# Altium PCB load-cell.PcbDoc
Units mm, origin at the board's own origin, x right, y up, seen from the top; angles counter-clockwise.
Board outline 30 x 35 mm, 2 copper layers (Top Layer, Bottom Layer), stack 0.451 mm thick; 33 components, 26 nets, 115 pads, 59 vias.
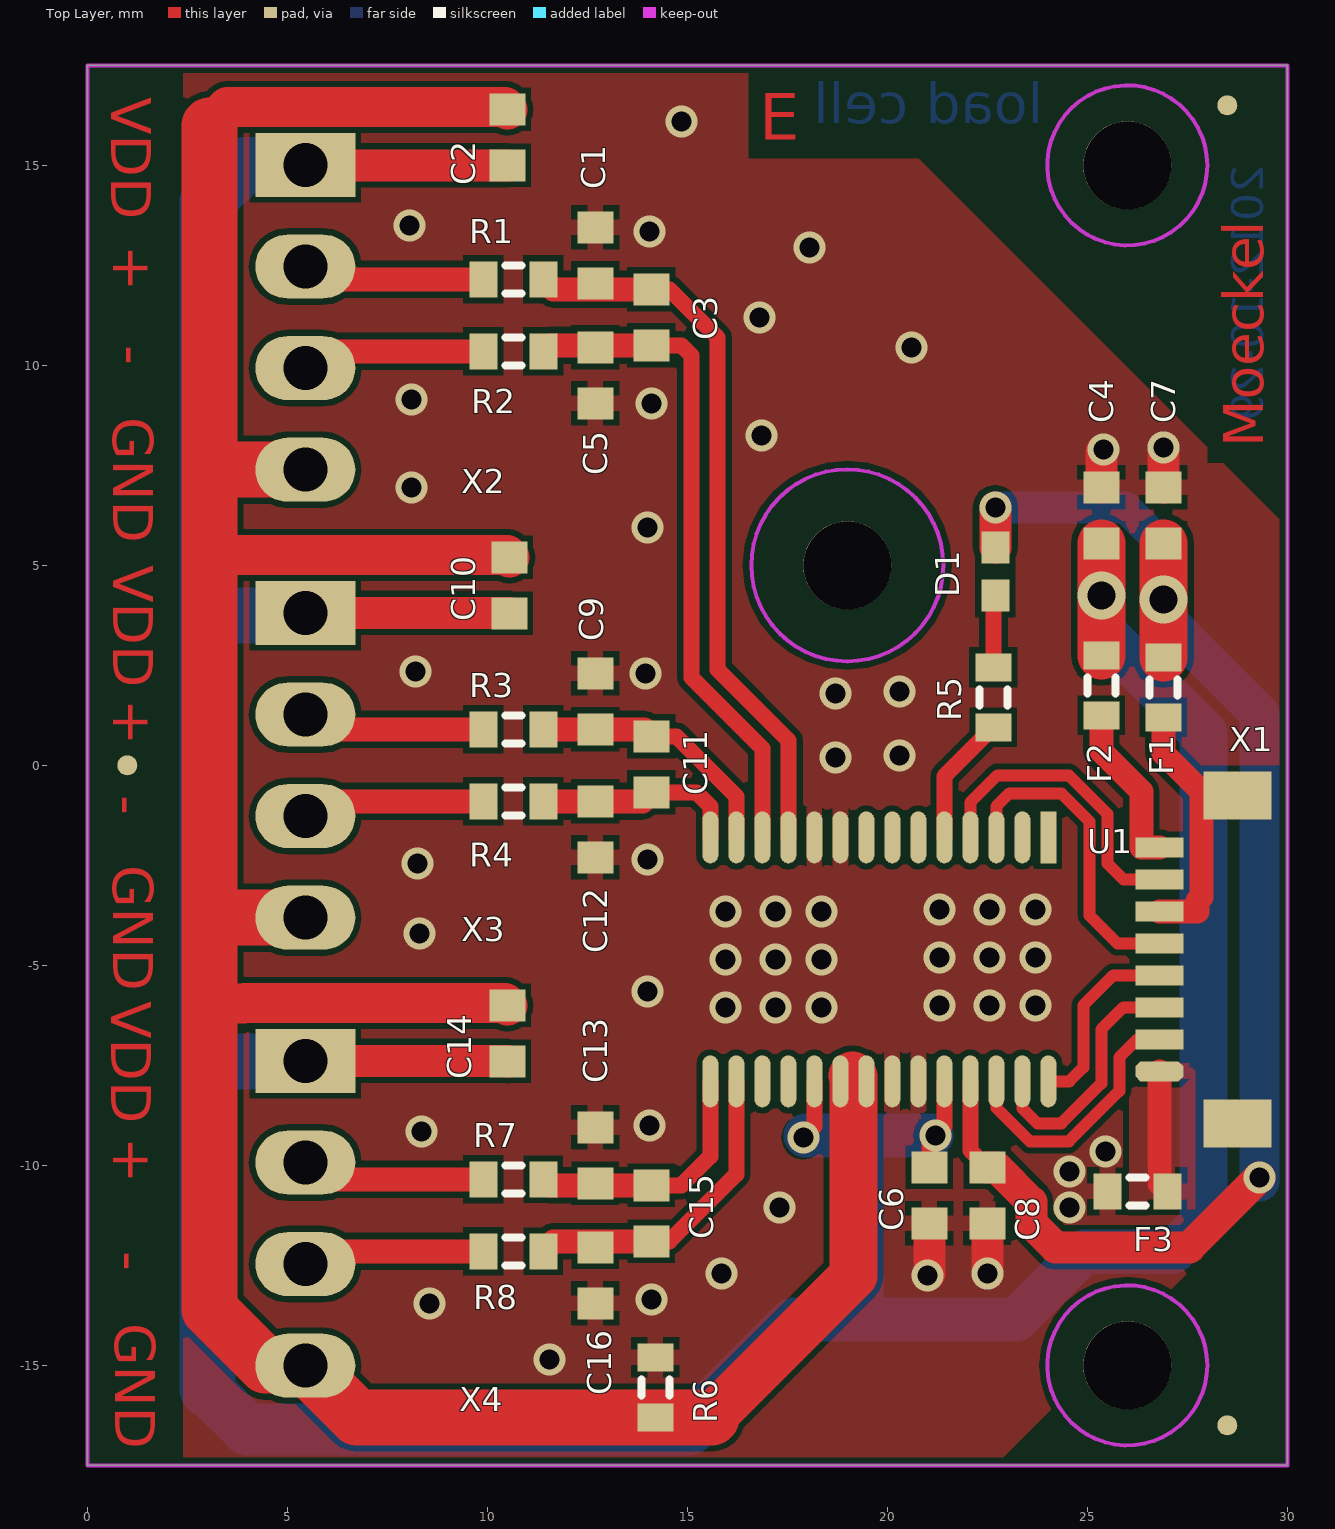
[diagram p0: Top Layer view]
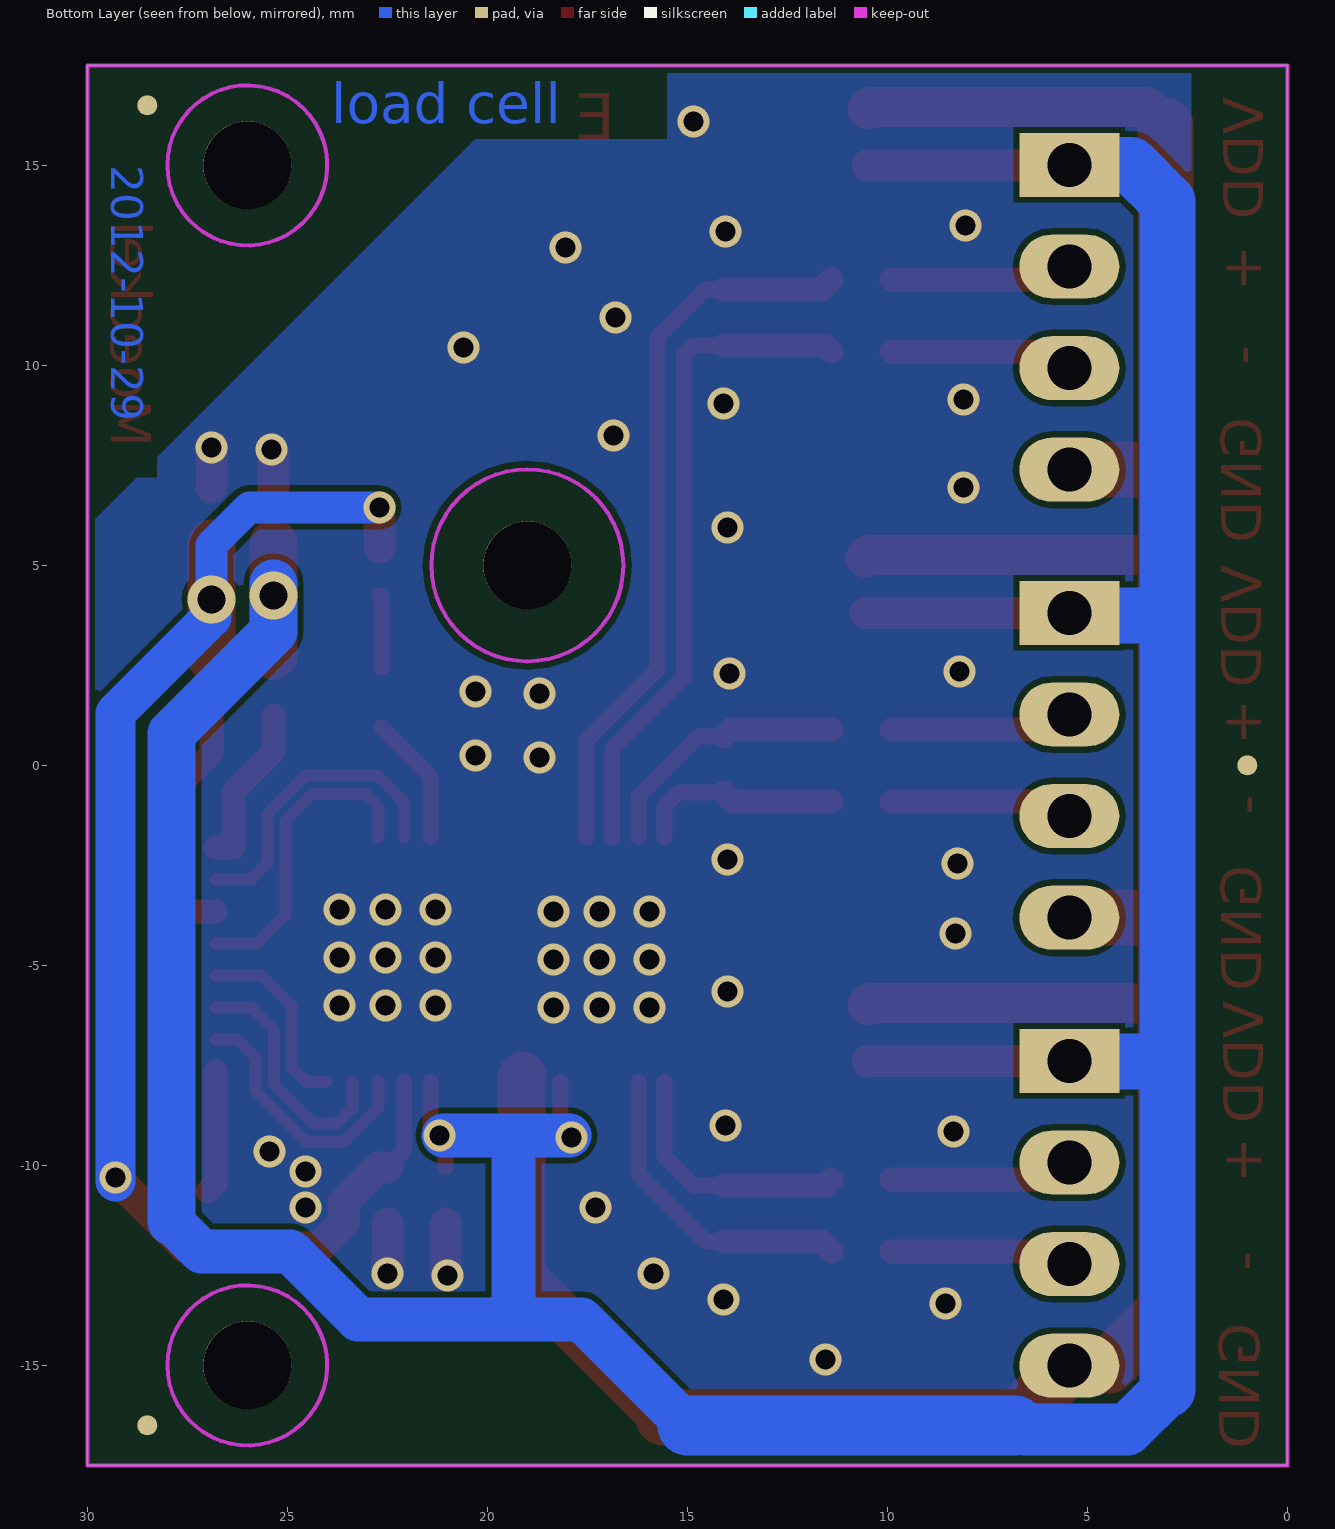
[diagram p1: Bottom Layer view, seen from below]

## Layer stack, top to bottom
Top Solder: solder mask 0.0102, Solder Resist, Dk 3.5
Top Layer: signal copper 0.0356
Dielectric1: prepreg 0.38, FR-4, Dk 4.8
Bottom Layer: signal copper 0.0356
Bottom Solder: solder mask 0.0102, Solder Resist, Dk 3.5

## Board outline
0,-17.5 30,-17.5 30,17.5 0,17.5

## Design rules (kind name [scope] priority, off if disabled: settings)
Clearance [All] p1: gap=0.15
FabricationTestPointUsage TestPointUsage [All] p1: valid=0 allowmultiple=FALSE
FabricationTestpoint Testpoint [All] p1: side=3 testpointundercomponent=TRUE minsize=1.016 maxsize=2.54 preferedsize=1.524 minholesize=0 maxholesize=1.016 preferedholesize=0.813 testpointgrid=0.025 allowsidetop=TRUE allowsidebottom=TRUE usegrid=TRUE gridtolerance=0
Height [All] p1: minheight=0 maxheight=100 prefheight=12.7
HoleSize [All] p1: absolutevalues=TRUE maxlimit=3 minlimit=0.2 maxpercent=80.000 minpercent=20.000
HoleToHoleClearance [All] p1: gap=0.2 allowstackedmicrovias=TRUE
MinimumSolderMaskSliver [All] p1: minsoldermaskwidth=0.1
PolygonConnect PolygonConnect_1 [IsVia] p1: connectstyle=Direct reliefconductorwidth=0.254 reliefentries=4 polygonreliefangle="90 Angle" airgapwidth=0.254
PolygonConnect [All] p2: connectstyle=Relief reliefconductorwidth=0.4 reliefentries=4 polygonreliefangle="90 Angle" airgapwidth=0.254
RoomDefinition load_cell [InComponentClass('load_cell')] p1: confinementstyle=ConfineIn formatcopy=TRUE lockcomponents=FALSE outline -0.2,-17.7 30.15,-17.7 30.15,17.65 -0.2,17.65
RoutingVias [All] p1: holewidth=0.3 width=0.6 viastyle="Through Hole" minholewidth=0.2 minwidth=0.5 maxholewidth=0.8 maxwidth=1.5
SilkToSilkClearance [All] p1: silktosilkclearance=0.15
SilkToSolderMaskClearance SilkscreenOverComponentPads [IsPad] p1: minsilkscreentomaskgap=0.09 clearancetoexposedcopper=TRUE
SolderMaskExpansion [All] p1: expansion=0.05
Width [All] p1: maxlimit=2 minlimit=0.15 preferedwidth=0.2
21 further rules are at their usual default settings.

## Components (designator, comment, footprint, x,y, rotation, side; value= is the part's Value field where it differs from the comment)
C1 "10nF" CAPC1608L 12.7,12.75 r270 top
C2 "100nF" CAPC1608L 10.5,15.7 r270 top
C3 "10nF" CAPC1608L 14.1,11.2 r270 top
C4 "10uF" CAPC1608L 25.35,6.25 r270 top
C5 "10nF" CAPC1608L 12.7,9.75 r270 top
C6 "100nF" CAPC1608L 21.05,-10.75 r90 top
C7 "10uF" CAPC1608L 26.9,6.25 r270 top
C8 "100nF" CAPC1608L 22.5,-10.75 r90 top
C9 "10nF" CAPC1608L 12.7,1.6 r270 top
C10 "100nF" CAPC1608L 10.55,4.5 r270 top
C11 "10nF" CAPC1608L 14.1,0.025 r270 top
C12 "10nF" CAPC1608L 12.7,-1.6 r270 top
C13 "10nF" CAPC1608L 12.7,-9.75 r270 top
C14 "100nF" CAPC1608L 10.5,-6.7 r270 top
C15 "10nF" CAPC1608L 14.1,-11.2 r270 top
C16 "10nF" CAPC1608L 12.7,-12.75 r270 top
D1 "LED Green" RESC1005N 22.7,4.85 r270 top
F1 "250mA, 0.75R" RESC1608L 26.9,1.95 r90 top
F2 "250mA, 0.75R" RESC1608L 25.35,2 r90 top
F3 "250mA, 0.75R" RESC1608L 26.25,-10.65 r180 top
R1 "100R" RESC1608L 10.65,12.15 r0 top
R2 "100R" RESC1608L 10.65,10.35 r0 top
R3 "100R" RESC1608L 10.65,0.9 r0 top
R4 "100R" RESC1608L 10.65,-0.9 r0 top
R5 "470R" RESC1608L 22.65,1.7 r90 top
R6 "xR" RESC1608L 14.2,-15.55 r90 top
R7 "100R" RESC1608L 10.65,-10.35 r0 top
R8 "100R" RESC1608L 10.65,-12.15 r0 top
U1 "AD7193" TSSOP65-28N-NO_TP 19.8,-4.85 r270 top
X1 "SM08B-SURS" SM08B-SURS 26.8,-4.85 r180 top
X2 "282834-4" 282834-4 5.45,11.2 r0 top
X3 "282834-4" 282834-4 5.45,0 r0 top
X4 "282834-4" 282834-4 5.45,-11.2 r0 top

## Footprints (in the part's own frame and the unit in brackets; to place one, negate y for a bottom-side part, rotate by r counter-clockwise, add the part's x,y. Pads: shape width x height; smd on the part's side, far side on the other; paste and mask are expansions set on the pad)
282834-4 [mm] "6-pin wire-to-board connector, 10.62x6.5mm, Pitch 2.54mm, IPC Low Density"
  rect 2.5x1.6 hole 1.1: 1(0,3.81)
  oval 2.5x1.6 hole 1.1: 2(0,1.27) 3(0,-1.27) 4(0,-3.81)
  body extent -3.25,-5.31 3.25,5.31, height 10
CAPC1608L [mm] "Chip Capacitor, Body 1.6x0.8mm, IPC High Density"
  rect 0.8x0.9 smd: 1(-0.7,0) 2(0.7,0)
  body extent -0.87,-0.48 0.87,0.48, height 0.85
RESC1005N [mm] "Chip Resistor, Body 1.1x0.5mm, IPC Medium Density"
  rect 0.8x0.7 smd: 1(-0.6,0) 2(0.6,0)
  body extent -0.55,-0.3 0.55,0.3, height 0.4
RESC1608L [mm] "Chip Resistor, Body 1.6x0.8mm, IPC High Density"
  rect 0.7x0.9 smd: 1(-0.75,0) 2(0.75,0)
  silkscreen extent -0.2,-0.35 0.2,0.35, body extent -0.85,-0.48 0.85,0.48, height 0.6
SM08B-SURS [mm] "Wire-to-board connector, 8 pins, Body 8.6x2.7mm, Pitch 0.8mm, IPC Low Density"
  oct 1.2x0.5 smd: 1(0,2.8)
  rect 1.2x0.5 smd: 2(0,2) 3(0,1.2) 4(0,0.4) 5(0,-0.4) 6(0,-1.2) 7(0,-2) 8(0,-2.8)
  rect 1.7x1.2 smd: A(-1.95,4.1) B(-1.95,-4.1)
  body extent -2.45,-4.3 0.25,4.3, height 1.7
TSSOP65-28N-NO_TP [mm] "TSSOP, 28-Leads, Exposed Pad, Body 9.7x4.4mm, Pitch 0.65mm, IPC Medium Density"
  rect 1.3x0.4 smd: 1(-3.05,4.225)
  oval 1.3x0.4 smd: 2(-3.05,3.575) 3(-3.05,2.925) 4(-3.05,2.275) 5(-3.05,1.625) 6(-3.05,0.975) 7(-3.05,0.325) 8(-3.05,-0.325) 9(-3.05,-0.975) 10(-3.05,-1.625) 11(-3.05,-2.275) 12(-3.05,-2.925) 13(-3.05,-3.575) 14(-3.05,-4.225) 15(3.05,-4.225) 16(3.05,-3.575) 17(3.05,-2.925) 18(3.05,-2.275) 19(3.05,-1.625) 20(3.05,-0.975) 21(3.05,-0.325) 22(3.05,0.325) 23(3.05,0.975) 24(3.05,1.625) 25(3.05,2.275) 26(3.05,2.925) 27(3.05,3.575) 28(3.05,4.225)
  body extent -2.25,-4.9 2.25,4.9, height 1.2

## Part data
C1 C2 C3 C4 C5 C6 C7 C8 C9 C10 C11 C12 C13 C14 C15 C16: library part Cap, "Capacitor"
D1: library part LED, "LED"
F1 F2 F3: library part "Fuse 1", "Ferrit Bead"
R1 R2 R3 R4 R5 R6 R7 R8: library part Res1, "Resistor"
U1: library part AD7193_TSSOP, "4-channel 24-bit ADC with PGA"
X1: "wire-to-board connector"
X2 X3 X4: library part "4x1 282834-4", "4-pin connector with screw contacts"

## Free pads (board coordinates)
  round 0.5 smd: 0(1,0) 0(28.5,-16.5) 0(28.5,16.5)
  round 0.5 smd far side: 0(1,0) 0(28.5,-16.5) 0(28.5,16.5)
  round 2.2 hole 2.2: 0(19,5) 0(26,-15) 0(26,15)

## Via types
v1: diameter 0.8, hole 0.5, Top Layer to Bottom Layer, tented both sides, 39 vias
v2: diameter 0.8, hole 0.5, Top Layer to Bottom Layer, 18 vias
v3: diameter 1.2, hole 0.7, Top Layer to Bottom Layer, tented both sides, 2 vias

## Nets (pads, with @x,y where several pads share a name; then routed paths per layer and width w, separated by ;. In a path a pad name is that pad's centre, name@x,y a point inside that pad or via, vN(x,y) a via of type N, cw(c..) or ccw(c..) an arc to the next point about the centre after c; other vN are vias at no path point)
3.3V: C7.2 C8.2 D1.1 F1.2 U1.25 | length 36.3
  Top Layer w0.4: U1.25 22.075,-9.625 C8.2
  Top Layer w0.8: C8.2 22.728,-10.05 23.6,-10.922 23.6,-11.444 24.206,-12.05 27.55,-12.05 v1(29.3,-10.3) ; D1.1 v1(22.7,6.45)
  Top Layer w1.2: F1.2 C7.2
  Bottom Layer w0.8: v1(22.7,6.45) 25.95,6.45 26.9,5.5 26.9,4.55 v3@26.9,3.7
  Bottom Layer w1: v3@26.9,3.7 29.3,1.3 v1(29.3,-10.3) v1@29.3,-10.4
  other v3: 26.9,4.15
3V3: F1.1 X1.6 X1.B | length 6.2
  Top Layer w0.6: X1.6 27.75,-3.65 27.75,-3.386 27.85,-3.286 27.85,-0.65 26.9,0.3 F1.1
5V_CLEAN: F2.1 X1.8 | length 4.2
  Top Layer w0.6: F2.1 25.35,0.35 26.35,-0.65 26.35,-2.05 X1.8
AGND: C1.1 C4.1 C5.2 C6.1 C7.1 C8.1 C9.1 C12.2 C13.1 C16.2 F3.2 R6.2 U1.9 U1.10 U1.22 U1.23 | length 4.4
  Top Layer w0.8: v1@21.05,-12.7 C6.1 ; v1(22.5,-12.7) C8.1 ; C4.1 v1@25.35,7.85 ; C7.1 v1(26.9,7.95)
  other v1: 11.55,-14.85 8.55,-13.45 14.1,-13.35 21,-12.75 15.85,-12.7 17.3,-11.05 24.55,-11.05 24.55,-10.15 25.45,-9.65 8.35,-9.15 14.05,-9 14,-5.65 8.3,-4.2 8.25,-2.45 14,-2.35 18.7,0.2 20.3,0.25 18.7,1.8 20.3,1.85 13.95,2.3 8.2,2.35 14,5.95 8.1,6.95 25.4,7.9 16.85,8.25 14.1,9.05 8.1,9.15 20.6,10.45 16.8,11.2 18.05,12.95 14.05,13.35 8.05,13.5 14.85,16.1
  other v2: 15.95,-6.05 17.2,-6.05 18.35,-6.05 21.3,-6 22.55,-6 23.7,-6 15.95,-4.85 17.2,-4.85 18.35,-4.85 21.3,-4.8 22.55,-4.8 23.7,-4.8 15.95,-3.65 17.2,-3.65 18.35,-3.65 21.3,-3.6 22.55,-3.6 23.7,-3.6
AVDD: C2.2 C4.2 C6.2 C10.2 C14.2 F2.2 U1.19 U1.24 X2.1 X3.1 X4.1 | length 111.5
  Top Layer w0.4: v1(17.9,-9.3) 18.175,-9.025 U1.19 ; C6.2 21.05,-9.4 v1(21.2,-9.25) 21.425,-9.025 U1.24
  Top Layer w0.8: X4.1 10.49,-7.39 C14.2 ; X3.1 C10.2@10.55,3.81 ; X2.1 5.46,15 C2.2
  Top Layer w1.2: F2.2 C4.2
  Bottom Layer w1.1: 15,-16.5 17.65,-13.85 23.227,-13.85 24.927,-12.15 27.15,-12.15 27.9,-11.4 ; v1@17.95,-9.25 19.35,-9.25 ; 19.35,-13.8 19.35,-9.25 ; v1@21.1,-9.25 19.35,-9.25
  Bottom Layer w1.2: v3@25.35,4.55 v3(25.35,4.25) 25.35,3.35 27.9,0.8 27.9,-11.4
  Bottom Layer w1.3: 3,-15.6 4.01,-16.61 6.563,-16.61 6.673,-16.5 6.814,-16.5
  Bottom Layer w1.4: 3,-15.6 3,-7.4 ; X4.1 5.44,-7.4 3,-7.4 ; X3.1 5.39,3.75 3,3.75 ; X2.1 3.91,15.01 3,14.1 3,3.75 ; 3,-7.4 3,3.75
  Bottom Layer w1.5: 6.814,-16.5 15,-16.5
C\S\: U1.4 X1.7 | length 7.7
  Top Layer w0.3: U1.4 22.075,-0.925 22.75,-0.25 24.536,-0.25 25.5,-1.214 25.5,-2.45 25.9,-2.85 X1.7
DGND: F3.1 X1.1 | length 3.1
  Top Layer w0.6: X1.1 26.8,-10.45 F3.1
DIN: U1.28 X1.4 | length 4.8
  Top Layer w0.3: U1.28 24.55,-7.9 24.9,-7.55 24.9,-6 25.65,-5.25 X1.4
DOUT: U1.27 X1.3 | length 6.2
  Top Layer w0.3: U1.27 23.375,-8.575 23.75,-8.95 24.35,-8.95 25.35,-7.95 25.35,-6.6 25.9,-6.05 X1.3
NetC1_2: C1.2 C3.1 R1.2 U1.11 | length 18.2
  Top Layer w0.4: C3.1 14.55,11.9 15.75,10.7 15.75,2.4 17.525,0.625 U1.11
  Top Layer w0.6: R1.2 11.65,11.9 C3.1
NetC3_2: C3.2 C5.1 R2.2 U1.12 | length 16.7
  Top Layer w0.4: C3.2 14.85,10.5 15.1,10.25 15.1,2.2 16.875,0.425 U1.12
  Top Layer w0.6: R2.2 11.55,10.5 C3.2
NetC9_2: C9.2 C11.1 R3.2 U1.13 | length 6.5
  Top Layer w0.4: C11.1 14.725,0.725 16.225,-0.775 U1.13
  Top Layer w0.6: R3.2 13.925,0.9 C11.1
NetC11_2: C11.2 C12.1 R4.2 U1.14 | length 5.2
  Top Layer w0.4: C11.2 15.225,-0.675 15.575,-1.025 U1.14
  Top Layer w0.6: R4.2 13.875,-0.9 C11.2
NetC13_2: C13.2 C15.1 R7.2 U1.15 | length 6.4
  Top Layer w0.4: C15.1 14.85,-10.5 15.575,-9.775 U1.15
  Top Layer w0.6: R7.2 11.55,-10.5 C15.1
NetC15_2: C15.2 C16.1 R8.2 U1.16 | length 7.9
  Top Layer w0.4: C15.2 14.55,-11.9 16.225,-10.225 U1.16
  Top Layer w0.6: R8.2 11.65,-11.9 C15.2
NetD1_2: D1.2 R5.2 | length 1.8
  Top Layer w0.4: R5.2 22.65,4.2 D1.2
NetR1_1: R1.1 X2.2 | length 4.6
  Top Layer w0.6: X2.2 5.77,12.15 R1.1
NetR2_1: R2.1 X2.3 | length 4.6
  Top Layer w0.6: X2.3 5.87,10.35 R2.1
NetR3_1: R3.1 X3.2 | length 4.6
  Top Layer w0.6: X3.2 5.82,0.9 R3.1
NetR4_1: R4.1 X3.3 | length 4.6
  Top Layer w0.6: X3.3 5.82,-0.9 R4.1
NetR5_1: R5.1 U1.5 | length 3.3
  Top Layer w0.4: U1.5 21.425,-0.275 R5.1
NetR7_1: R7.1 X4.2 | length 4.6
  Top Layer w0.6: X4.2 5.87,-10.35 R7.1
NetR8_1: R8.1 X4.3 | length 4.6
  Top Layer w0.6: X4.3 5.77,-12.15 R8.1
REF-1: C2.1 C10.1 C14.1 R6.1 U1.20 U1.21 X2.4 X3.4 X4.4 | length 80.8
  Top Layer w1: 3.05,-5.95 3.921,-5.95 3.931,-5.94 10.44,-5.94 C14.1 ; 3.05,5.1 3.21,5.26 10.49,5.26 C10.1 ; 3.05,16 3.51,16.46 10.44,16.46 C2.1
  Top Layer w1.2: 15.6,-16.3 19.15,-12.75 19.15,-7.775 19.125,-7.75
  Top Layer w1.4: 3.05,16 3.05,5.1 3.05,-5.95 3.05,-13.6 4.46,-15.01 X4.4 6.74,-16.3 R6.1 15.6,-16.3 ; 3.09,-3.81 X3.4 ; 3.09,7.39 X2.4
S\Y\N\C\: U1.26 X1.2 | length 6.6
  Top Layer w0.3: U1.26 22.725,-8.561 23.564,-9.4 24.536,-9.4 25.8,-8.136 25.8,-7.3 26.25,-6.85 X1.2
SCLK: U1.3 X1.5 | length 7.9
  Top Layer w0.3: U1.3 22.725,-1.025 23.05,-0.7 24.35,-0.7 25.05,-1.4 25.05,-3.75 25.75,-4.45 X1.5
pads on no net: U1.1 U1.2 U1.6 U1.7 U1.8 U1.17 U1.18 X1.A

## Polygon pours and split planes (outlines as drawn)
DGND on Top Layer "DGND" (solid, pour order 5): 26.25,-7.3 26.05,-7.5 26.05,-11.1 27.7,-11.1 27.7,-7.55 27.45,-7.3
AGND on Top Layer "AGND" (solid, pour order 6): 25.9,-8.5 25.9,-11.5 24.1,-11.5 24.1,-9.2 24.8,-8.5
AGND on Top Layer "AGND" (solid, remove dead copper, pour order 8): 2.4,17.5 2.4,-17.5 22.7,-17.5 30,-10.2 30,5.95 18.45,17.5
AGND on Bottom Layer "AGND" (solid, remove dead copper, pour order 7): 2.4,17.5 2.4,-17.5 22.7,-17.5 30,-10.2 30,5.95 18.45,17.5

## Keep-outs
Keep-Out Layer:
  circle w0.1: c26,-15 r2
  circle w0.1: c19,5 r2.4
  circle w0.1: c26,15 r2
  lines w0.1: 0,-17.5 30,-17.5 30,17.5 0,17.5 0,-17.5

## Other copper
Top Layer:
  text "VDD" at 0.6,16.7 h1 r270
  text "E" at 16.8,15.25 h2
  text "+" at 0.65,13 h1 r270
  text "-" at 0.65,10.5 h1 r270
  text "GND" at 0.65,8.7 h1 r270
  text "Moeckel" at 29.4,7.95 h1 r90
  text "VDD" at 0.65,5 h1 r270
  text "+" at 0.65,1.65 h1 r270
  text "-" at 0.55,-0.75 h1 r270
  text "GND" at 0.65,-2.5 h1 r270
  text "VDD" at 0.6,-5.9 h1 r270
  text "+" at 0.65,-9.3 h1 r270
  text "-" at 0.6,-12.15 h1 r270
  text "GND" at 0.7,-13.95 h1 r270
Bottom Layer:
  text "load cell" at 23.9,16.05 h1
  text "2012-10-29" at 29.4,15 h0.8 r90

## Silkscreen, mask and mechanical layers (free items; w line width, h text height)
Mechanical 1:
  the board outline again, w0.1

## Dimensions
30,17.5 to 30,-17.5 on Mechanical 9
0,17.5 to 30,17.5 on Mechanical 9
26,15 to 26,-15 on Mechanical 9
19,5 to 26,15 on Mechanical 9